# Altium PCB PCB1.PcbDoc
Units mil, origin at the board's own origin, x right, y up, seen from the top; angles counter-clockwise.
Board outline 1220 x 2320 mil, 2 copper layers (Top Layer, Bottom Layer); 23 components, 21 nets, 112 pads, 0 vias.
Unrouted connection lines stored in the file: 39.
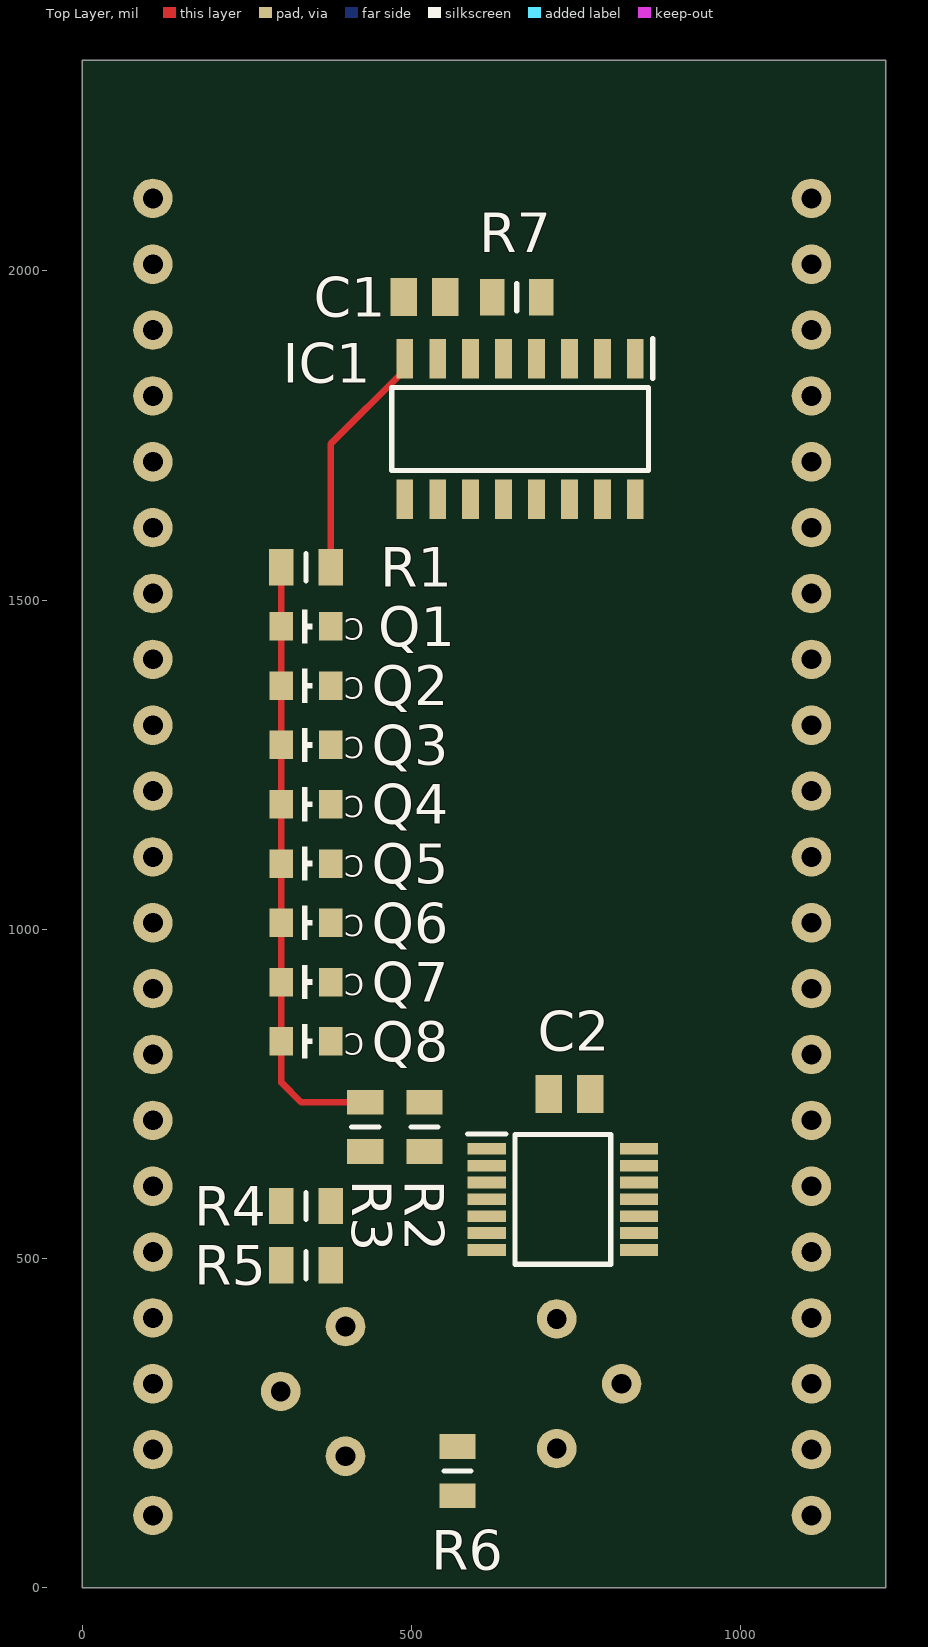
[diagram p0: Top Layer view]
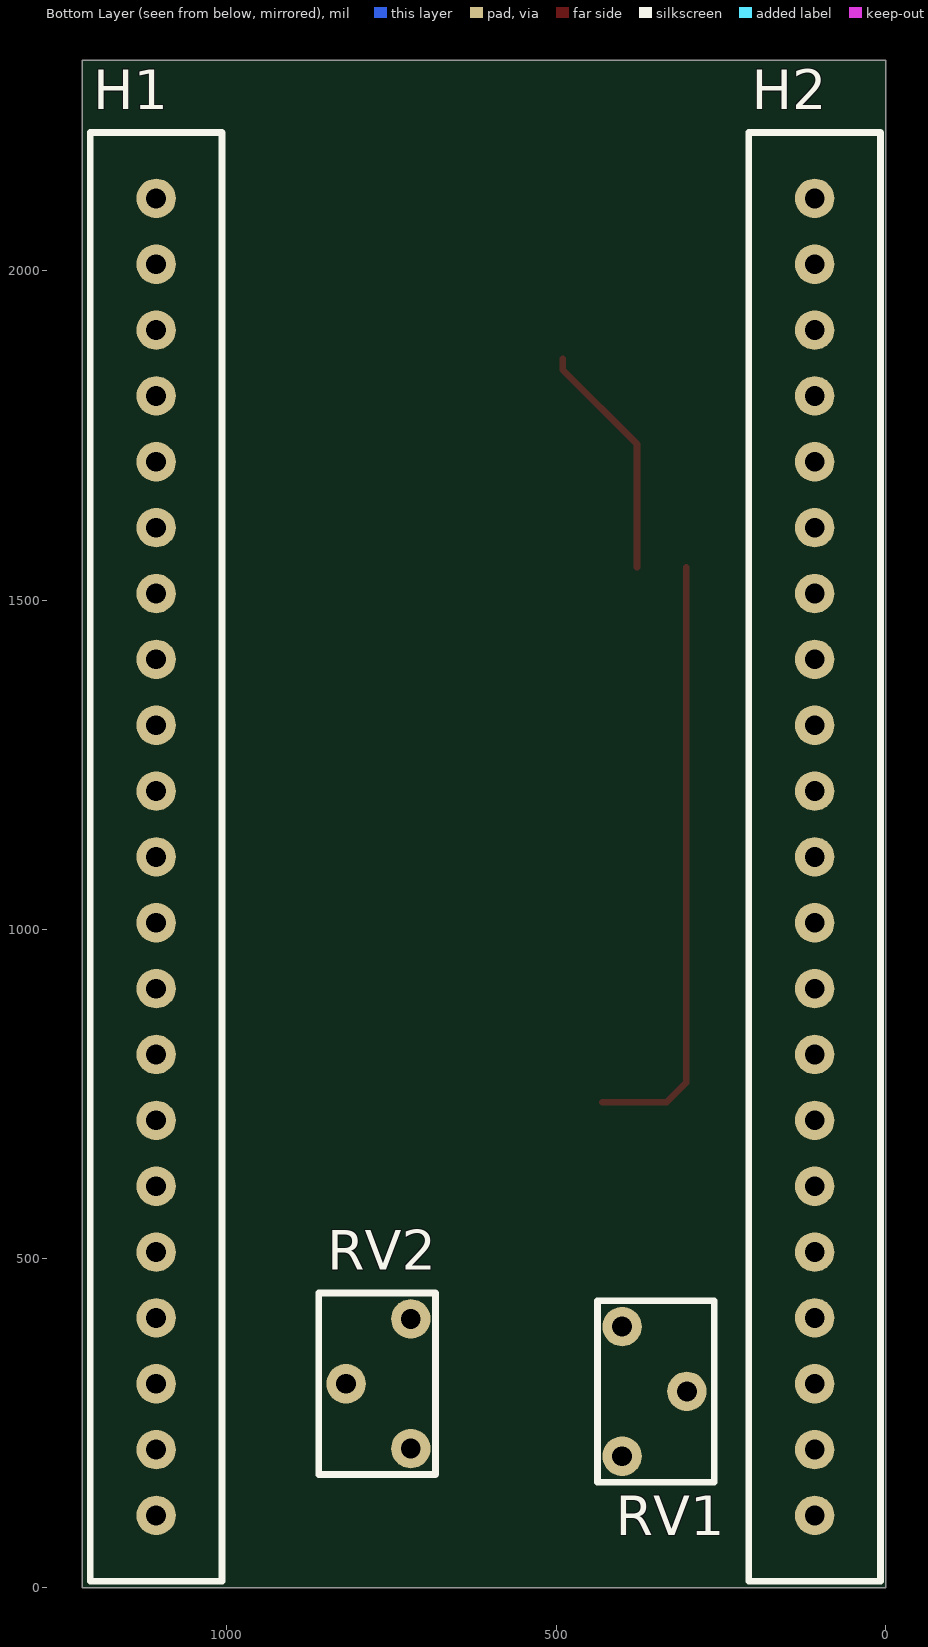
[diagram p1: Bottom Layer view, seen from below]

## Layer stack, top to bottom
Top Solder: solder mask 0.4, Solder Resist, Dk 3.5
Top Layer: signal copper 1.4
Dielectric 1: dielectric 12.6, FR-4, Dk 4.8
Bottom Layer: signal copper 1.4
Bottom Solder: solder mask 0.4, Solder Resist, Dk 3.5

## Board outline
0,0 1220,0 1220,2320 0,2320

## Design rules (kind name [scope] priority, off if disabled: settings)
Clearance [All] p1: gap=10 ignorepadtopadclearanceinfootprint=FALSE except(0: Arc-Hole Track-Hole SMDPad-Hole THPad-Hole Via-Hole Fill-Hole Poly-Hole Region-Hole Text-Hole)
PolygonConnect [All] p1: connectstyle=Relief reliefconductorwidth=10 reliefentries=4 polygonreliefangle="90 Angle" airgapwidth=10
RoutingVias [All] p1: holewidth=28 width=50 viastyle="Through Hole" minholewidth=28 minwidth=50 maxholewidth=28 maxwidth=50
SolderMaskExpansion [All] p1: expansion=4 istentingtop=FALSE
Width [All] p1: maxlimit=10 minlimit=10 preferedwidth=10
30 further rules are at their usual default settings.

## Classes and differential pairs
component class Sheet1: C1 C2 H1 H2 IC1 Q1 Q2 Q4 Q5 Q6 Q7 Q8 R1 RV1 RV2

## Components (designator, comment, footprint, x,y, rotation, side; value= is the part's Value field where it differs from the comment)
C1 "C-0,1µF-smd" C-0,1µF-smd 520,1960 r0 top
C2 "C-0,1µF-smd" C-0,1µF-smd 740,750 r0 top
H1 "Header 21" "Header 21" 1107.6,2110 r180 bottom
H2 "Header 21" "Header 21" 107.6,2110 r180 bottom
IC1 "demultiplexer" demultiplexer 665,1760 r270 top
Q1 "400-1100nm, 1mA, 130deg" WL-STCW_0805 340,1460 r180 top
Q2 "400-1100nm, 1mA, 130deg" WL-STCW_0805 340,1370 r180 top
Q3 "400-1100nm, 1mA, 130deg" WL-STCW_0805 340,1280 r180 top
Q4 "400-1100nm, 1mA, 130deg" WL-STCW_0805 340,1190 r180 top
Q5 "400-1100nm, 1mA, 130deg" WL-STCW_0805 340,1100 r180 top
Q6 "400-1100nm, 1mA, 130deg" WL-STCW_0805 340,1010 r180 top
Q7 "400-1100nm, 1mA, 130deg" WL-STCW_0805 340,920 r180 top
Q8 "400-1100nm, 1mA, 130deg" WL-STCW_0805 340,830 r180 top
R1 "R-1K-smd" R-1K-smd 340,1550 r180 top
R2 "R-1K-smd" R-1K-smd 520,700 r90 top
R3 "R-1K-smd" R-1K-smd 430,700 r270 top
R4 "R-1K-smd" R-1K-smd 340,580 r180 top
R5 "R-1K-smd" R-1K-smd 340,490 r0 top
R6 "R-1K-smd" R-1K-smd 570,177.4 r270 top
R7 "R-1K-smd" R-1K-smd 660,1960 r0 top
RV1 "Potentiometer" Potentiometer 350.79,298.43 r180 bottom
RV2 "Potentiometer" Potentiometer 770,310 r0 bottom
? "opamp" opamp 730,590 r0 top

## Footprints (in the part's own frame and the unit in brackets; to place one, negate y for a bottom-side part, rotate by r counter-clockwise, add the part's x,y. Pads: shape width x height; smd on the part's side, far side on the other; paste and mask are expansions set on the pad)
C-0,1µF-smd [mm]
  rect 1.02x1.47 smd: 1(-0.8,0) 2(0.8,0)
  body extent -1,-0.63 1,0.63, height 0.88
demultiplexer [mm]
  rect 1.525x0.65 smd: 1(-2.712,4.445) 2(-2.712,3.175) 3(-2.712,1.905) 4(-2.712,0.635) 5(-2.712,-0.635) 6(-2.712,-1.905) 7(-2.712,-3.175) 8(-2.712,-4.445) 9(2.712,-4.445) 10(2.712,-3.175) 11(2.712,-1.905) 12(2.712,-0.635) 13(2.712,0.635) 14(2.712,1.905) 15(2.712,3.175) 16(2.712,4.445)
  silkscreen extent -3.47,-4.95 1.6,5.12, body extent -3.01,-4.94 3.01,4.96, height 1.75
"Header 21" [mil]
  round 60 hole 30: 1(0,0) 2(0,-100) 3(0,-200) 4(0,-300) 5(0,-400) 6(0,-500) 7(0,-600) 8(0,-700) 9(0,-800) 10(0,-900) 11(0,-1000) 12(0,-1100) 13(0,-1200) 14(0,-1300) 15(0,-1400) 16(0,-1500) 17(0,-1600) 18(0,-1700) 19(0,-1800) 20(0,-1900) 21(0,-2000)
  silkscreen extent -100,-2100 100,100
opamp [mm]
  rect 1.475x0.45 smd: 1(-2.938,1.95) 2(-2.938,1.3) 3(-2.938,0.65) 4(-2.938,0) 5(-2.938,-0.65) 6(-2.938,-1.3) 7(-2.938,-1.95) 8(2.938,-1.95) 9(2.938,-1.3) 10(2.938,-0.65) 11(2.938,0) 12(2.938,0.65) 13(2.938,1.3) 14(2.938,1.95)
  silkscreen extent -3.67,-2.5 1.85,2.52, body extent -3.2,-2.5 3.2,2.5, height 1.13
Potentiometer [mil] "PT10LH01-104A2020-S"
  round 60 hole 30: 1(-49.21,98.43) 2(-49.21,-98.43) 3(49.21,0)
  silkscreen extent -87,-138 91,138
R-1K-smd [mm]
  rect 0.95x1.4 smd: 1(-0.95,0) 2(0.95,0)
  silkscreen extent 0,-0.53 0,0.53, body extent -1,-0.63 1,0.63, height 0.6
WL-STCW_0805 [mm] "SMT Phototransistor Chip Waterclear, body 2x1.3mm"
  rect 0.9x1.1 smd: 1(-0.95,0) 2(0.95,0)
  silkscreen extent -0.25,-0.65 0.15,0.65, body extent -1,-0.65 1,0.65, height 0.8

## Part data
C1 C2: "Capacitor", Manufacturer_Name=Kemet, Manufacturer_Part_Number=C0805C104K5RAC7411, Mouser2 Part Number=80-C0805C104K5RACLR, Datasheet Link=https://componentsearchengine.com//C0805C104K5RAC7411.pdf, Height=0.88mm, Mouser2 Price/Stock=https://www.mouser.com/Search/Refine.aspx?Keyword=80-C0805C104K5RACLR
IC1: "Integrated Circuit", Manufacturer_Name="Texas Instruments", Manufacturer_Part_Number=CD74HC237M, Mouser2 Part Number=595-CD74HC237M, Datasheet Link=http://www.ti.com/lit/ds/symlink/cd74hc237.pdf, Height=1.75mm, Mouser2 Price/Stock=https://www.mouser.com/Search/Refine.aspx?Keyword=595-CD74HC237M
Q1 Q2 Q3 Q4 Q5 Q6 Q7 Q8: library part 1540801NBA300, "WL-STCW SMT Phototransistor Chip Waterclear, size 0805, 400-1100nm, 1mA, 130deg", Collector Current min.=0.1mA, Collector Current typ.=1mA, Collector-Emitter Dark Current max.=100nA, Operating Temperature="-40 to +85degC", Chip Technology=Si, ComponentLink1Description=Manufacturer, ComponentLink1URL=http://www.we-online.de, ComponentLink2Description=Datasheet, ComponentLink2URL=https://www.we-online.com/catalog/datasheet/1540801NBA300.pdf, Manufacturer Part Number=1540801NBA300, Mounting Technology=SMT, Packaging="Tape and Reel", Published Date="March 2020", Publisher="Wurth Elektronik", Range of Spectral Bandwidth max.=1100nm, Range of Spectral Bandwidth min.=400nm, Size=0805, Viewing Angle=130deg, Wavelength of Peak Sensitivity typ.=940nm
R1 R2 R3 R4 R5 R6 R7: "Resistor", Manufacturer_Name="YAGEO (PHYCOMP)", Manufacturer_Part_Number=RC0805FR-131KL, Datasheet Link=https://datasheet.datasheetarchive.com/originals/distributors/Datasheets_SAMA/902f9e387b938f871d31120f5fc1d65e.pdf, Height=0.6mm
RV1 RV2: "PT10LH01-104A2020-S"
?: "Integrated Circuit", Manufacturer_Name="Texas Instruments", Manufacturer_Part_Number=LM2902MTX/NOPB, Mouser2 Part Number=926-LM2902MTX/NOPB, Datasheet Link=http://www.ti.com/lit/gpn/lm2902-n, Height=1.2mm, Mouser2 Price/Stock=https://www.mouser.com/Search/Refine.aspx?Keyword=926-LM2902MTX%2FNOPB

## Nets (pads, with @x,y where several pads share a name; then routed paths per layer and width w, separated by ;. In a path a pad name is that pad's centre, name@x,y a point inside that pad or via, vN(x,y) a via of type N, cw(c..) or ccw(c..) an arc to the next point about the centre after c; other vN are vias at no path point)
+5: ?.4 C1.2 C2.1 H1.20 IC1.6 IC1.16 RV1.1
GND: ?.11 C1.1 C2.2 H1.21 IC1.4 IC1.8 R1.1 R4.2 R6.2 R7.2 RV1.2 | length 363.4
  Top Layer w10: R1.1 377.4,1736.95 490,1849.55 IC1.8
Net_1: ?.1 ?.5 R2.2
Net_2: ?.2 R2.1 R3.2
Net_3: ?.3 R4.1 R5.2
Net_6: ?.6 R6.1 RV2.1
Net_7: ?.7 H1.3 RV2.3
NetH1_10: H1.10 IC1.1
NetH1_11: H1.11 IC1.2
NetH1_12: H1.12 IC1.3
NetH1_13: H1.13 IC1.5 R7.1
NetIC1_7: IC1.7 Q1.1
NetIC1_9: IC1.9 Q2.1
NetIC1_10: IC1.10 Q3.1
NetIC1_11: IC1.11 Q4.1
NetIC1_12: IC1.12 Q5.1
NetIC1_13: IC1.13 Q6.1
NetIC1_14: IC1.14 Q7.1
NetIC1_15: IC1.15 Q8.1
NetQ1_2: Q1.2 Q2.2 Q3.2 Q4.2 Q5.2 Q6.2 Q7.2 Q8.2 R1.2 R3.1 | length 922.4
  Top Layer w10: R1.2 Q1.2 Q2.2 Q3.2 Q4.2 Q5.2 Q6.2 Q7.2 Q8.2 302.6,767.4 332.6,737.4 R3.1
NetR5_1: R5.1 RV1.3
pads on no net: ?.8 ?.9 ?.10 ?.12 ?.13 ?.14 H1.1 H1.2 H1.4 H1.5 H1.6 H1.7 H1.8 H1.9 H1.14 H1.15 H1.16 H1.17 H1.18 H1.19 H2.1 H2.2 H2.3 H2.4 H2.5 H2.6 H2.7 H2.8 H2.9 H2.10 H2.11 H2.12 H2.13 H2.14 H2.15 H2.16 H2.17 H2.18 H2.19 H2.20 H2.21 RV2.2

## Text inside footprints (layer, text, board x,y; h text height)
Q1: Top Overlay "C" at 428.58,1471.81 h31.5 r180
Q2: Top Overlay "C" at 428.58,1381.81 h31.5 r180
Q3: Top Overlay "C" at 428.58,1291.81 h31.5 r180
Q4: Top Overlay "C" at 428.58,1201.81 h31.5 r180
Q5: Top Overlay "C" at 428.58,1111.81 h31.5 r180
Q6: Top Overlay "C" at 428.58,1021.81 h31.5 r180
Q7: Top Overlay "C" at 428.58,931.81 h31.5 r180
Q8: Top Overlay "C" at 428.58,841.81 h31.5 r180